# Altium PCB PCB1_corrosao.PcbDoc (part 2 of 2)
Units mil, origin at the board's own origin, x right, y up, seen from the top; angles counter-clockwise.
Board outline 5775 x 3675 mil, 2 copper layers (Top Layer, Bottom Layer); 104 components, 55 nets, 279 pads, 10 vias.
Unrouted connection lines stored in the file: 28.
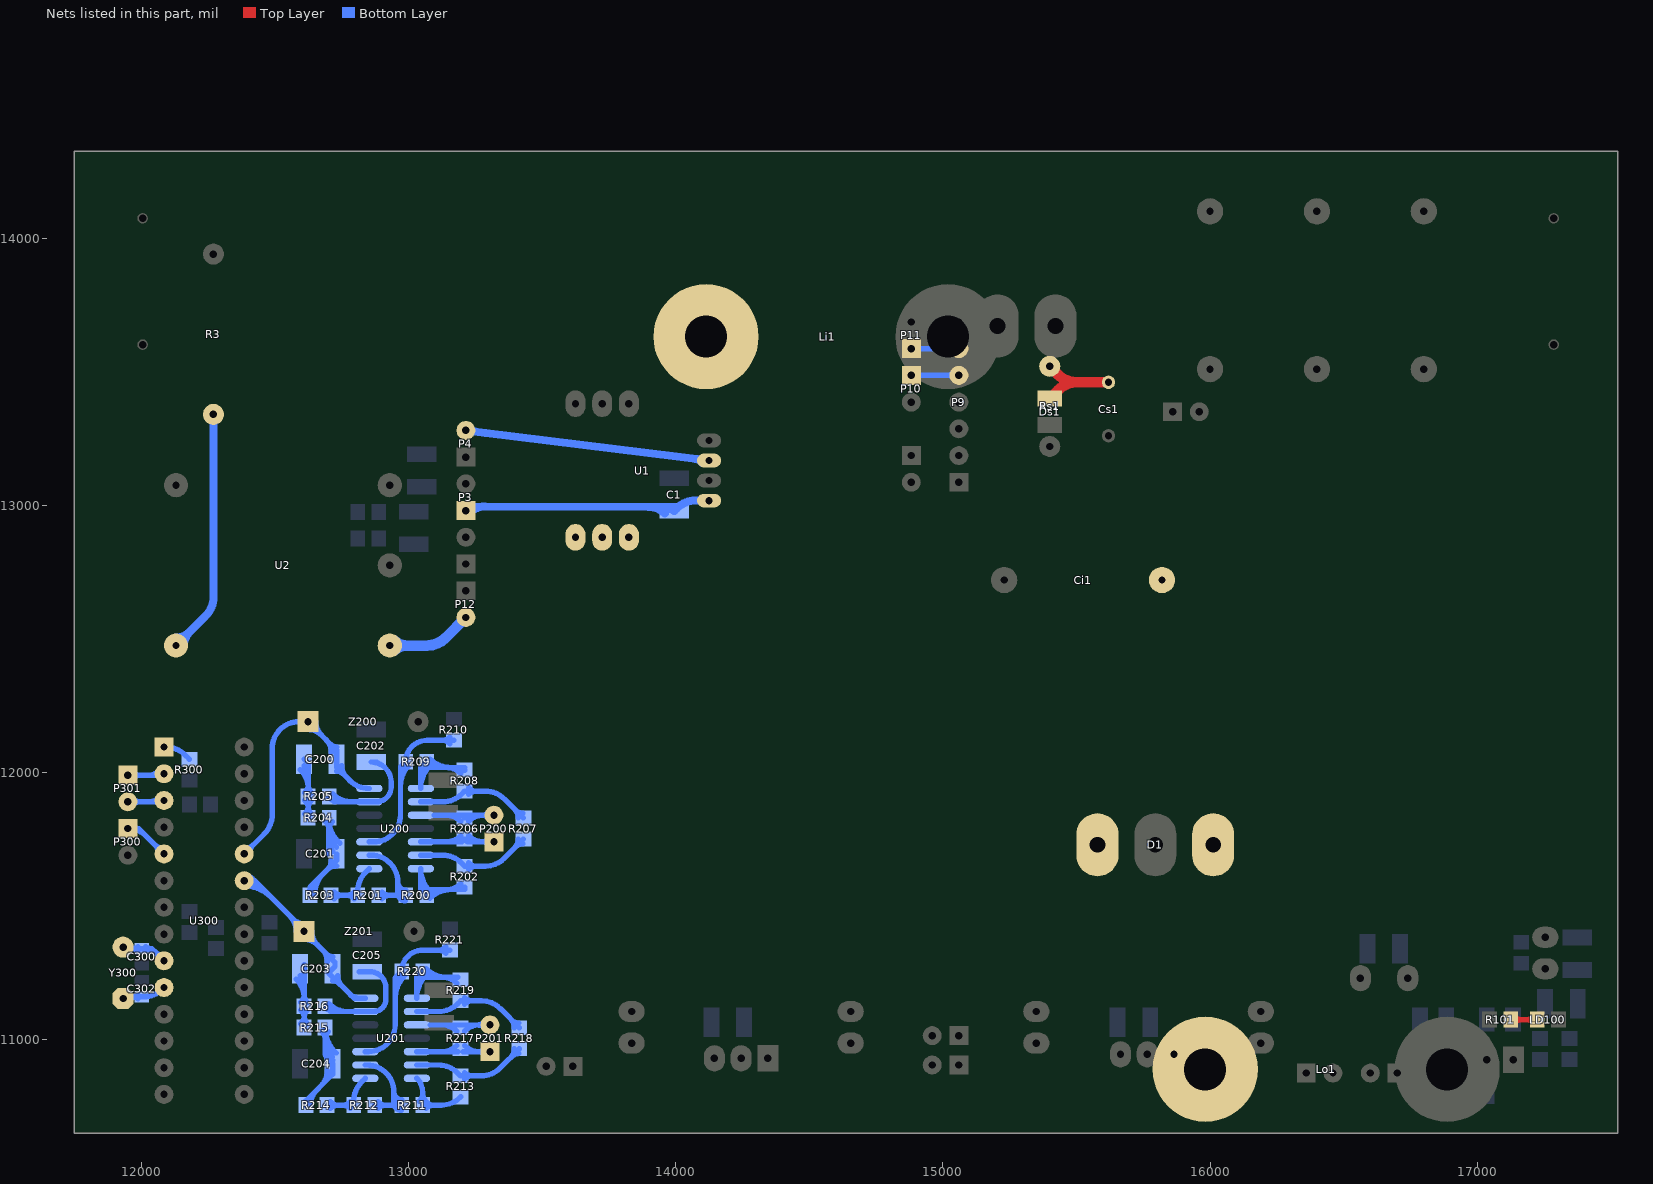
[diagram p2: the nets of this part, all layers, seen from the top]

## Via types
v1: diameter 47.24, hole 27.56, Top Layer to Bottom Layer, 8 vias
v2: diameter 255.91, hole 118.11, Top Layer to Bottom Layer, 2 vias

## Nets (pads, with @x,y where several pads share a name; then routed paths per layer and width w, separated by ;. In a path a pad name is that pad's centre, name@x,y a point inside that pad or via, vN(x,y) a via of type N, cw(c..) or ccw(c..) an arc to the next point about the centre after c; other vN are vias at no path point) (continued)
NetC200_1: C200.1 R204.1 R205.2 | length 544.1
  Bottom Layer w20: C200.1@12595.17,12010.6 cw(c12524.95,11940.39) 12624.25,11940.39 ; C200.1@12608.98,12050 12624.25,12034.72 R205.2@12624.25,11910 R204.1@12624.25,11830 ; C200.1@12609.31,12024.74 cw(c12573.24,11988.67) 12624.25,11988.67 ; R204.1@12611.84,11844.38 ccw(c12581.86,11874.36) 12624.25,11874.36 ccw(c12666.64,11874.36) R204.1@12636.67,11844.38 ; R205.2@12611.84,11895.62 cw(c12581.86,11865.64) 12624.25,11865.64 cw(c12666.64,11865.64) R205.2@12636.67,11895.62 ; R205.2@12611.84,11924.38 ccw(c12581.86,11954.36) 12624.25,11954.36 ccw(c12666.64,11954.36) R205.2@12636.67,11924.38
NetC200_2: C200.2 U200.14 U300.24 Z200.2 | length 1451.2
  Bottom Layer w19.68: U300.24@12385,11695 12460.71,11770.71 ; U300.24@12385,11714.68 ccw(c12385,11762.21) 12418.6,11728.6 ccw(c12452.21,11695) U300.24@12404.68,11695
  Bottom Layer w20: 12460.71,11770.71 ccw(c12390,11841.42) 12490,11841.42 12490,12090 cw(c12590,12090) 12497.16,12127.16 cw(c12590,12090) 12552.84,12182.84 cw(c12590,12090) 12590,12190 Z200.2@12624.09,12190 12731.02,12083.07 C200.2@12731.02,12050 ; Z200.2@12624.09,12160.63 cw(c12624.09,12089.72) 12674.23,12139.86 cw(c12724.37,12190) Z200.2@12653.46,12190 ; 12692.4,12121.7 cw(c12646.29,12075.59) C200.2@12711.5,12075.59 ; C200.2@12710.46,12103.64 ccw(c12731.02,12124.2) C200.2@12731.02,12095.12 ; C200.2@12731.02,12004.88 cw(c12731.02,11970.85) C200.2@12755.08,11994.92 ; C200.2@12750.55,12024.41 ccw(c12810.81,12024.41) 12768.2,11981.8 ; U200.14@12853.54,11940 12851.42,11940 cw(c12851.42,12040) 12780.71,11969.29 12731.02,12018.98 C200.2@12731.02,12050 ; C200.2@12731.02,12050 ccw(c12651.18,12050) 12707.64,12106.46 cw(c12651.18,12050) C200.2@12731.02,12050
NetC201_2: C201.2 R203.1 R204.2 | length 838.4
  Bottom Layer w20: R203.1@12628.82,11541.97 cw(c12693.64,11541.97) 12647.8,11587.8 ; R203.1@12631.26,11540 12631.26,11571.26 12731.02,11671.02 C201.2@12731.02,11695 ; R203.1@12648.82,11541.97 cw(c12761.93,11541.97) 12681.95,11621.95 ; R204.2@12690.58,11815.62 cw(c12665.35,11790.39) 12701.02,11790.39 ; 12694.93,11634.93 cw(c12731.02,11598.84) C201.2@12731.02,11649.88 ; 12698.83,11638.83 ccw(c12668.25,11669.41) C201.2@12711.5,11669.41 ; 12701.02,11695 12701.02,11828.03 ccw(c12822.79,11828.03) C201.2@12743.71,11735.44 ; 12701.02,11697.87 ccw(c12711.62,11697.87) C201.2@12704.74,11689.82 ; 12701.02,11741.26 ccw(c12748.68,11741.26) C201.2@12717.73,11705.02 ; 12701.02,11780.89 cw(c12750.14,11780.89) R204.2@12715.41,11815.62 ; 12701.02,11784.64 ccw(c12785.73,11784.64) C201.2@12730.72,11720.23
NetC202_2: C202.2 R205.1 U200.13 | length 581.3
  Bottom Layer w20: R205.1@12701.27,11906.31 ccw(c12740.63,11945.67) 12740.63,11890 ; R205.1@12702.99,11910 12722.99,11890 U200.13@12853.54,11890 ; R205.1@12715.41,11920.45 ccw(c12788.92,11993.95) 12788.92,11890 ; C202.2@12881.02,12038.98 C202.2@12860,12038.98 cw(c12860,11963.98) 12935,11963.98 12935,11945 cw(c12880,11945) U200.13@12880,11890 ; U200.13@12853.54,11890 U200.13@12880,11890 ; U200.13@12853.54,11890 U200.13@12880,11890
NetC203_1: C203.1 R215.1 R216.2 | length 559.4
  Bottom Layer w20: C203.1@12580.17,11225.6 cw(c12508.15,11153.58) R216.2@12610,11153.58 ; C203.1@12594.31,11239.74 cw(c12556.43,11201.87) 12610,11201.87 ; R215.1@12596.84,11059.38 ccw(c12566.86,11089.36) 12609.25,11089.36 ccw(c12651.64,11089.36) R215.1@12621.67,11059.38 ; R216.2@12596.84,11110.62 cw(c12566.86,11080.64) 12609.25,11080.64 cw(c12651.64,11080.64) R216.2@12621.67,11110.62 ; R216.2@12596.84,11139.38 ccw(c12565.05,11171.17) 12610,11171.17 ; R215.1@12609.25,11045 R216.2@12609.25,11125 R216.2@12610,11124.25 ; 12610,11167.55 ccw(c12649.84,11167.55) R216.2@12621.67,11139.38 ; C203.1@12610,11280 12610,11265 R216.2@12610,11125 ; R216.2@12610,11124.25 R216.2@12610,11125 ; R216.2@12610,11124.25 R216.2@12610,11125
NetC203_2: C203.2 U201.14 U300.23 Z201.2 | length 1456.3
  Bottom Layer w20: U300.23@12384.72,11595.38 cw(c12403.83,11569.14) 12426.79,11592.1 ; U300.23@12385,11575.47 cw(c12385,11434.46) 12484.71,11534.17 ; U300.23@12385,11595 12423.88,11595 ; U300.23@12385,11595.47 cw(c12385,11502.74) 12450.57,11568.31 ; U300.23@12385,11615.47 cw(c12385,11571.03) U300.23@12416.43,11602.45 ; U300.23@12396.5,11579.22 cw(c12417.77,11550.01) 12443.32,11575.56 ; U300.23@12400.66,11583.34 cw(c12423.88,11566.06) 12423.88,11595 ; U300.23@12400.66,11606.66 ccw(c12423.88,11623.94) 12423.88,11595 ; 12555.57,11463.31 cw(c12497.26,11405) Z201.2@12579.72,11405 ; 12567.13,11451.75 ccw(c12609.09,11493.71) Z201.2@12609.09,11434.37 ; Z201.2@12609.09,11375.63 cw(c12609.09,11304.72) 12659.23,11354.86 cw(c12709.37,11405) Z201.2@12638.46,11405 ; 12677.4,11336.7 cw(c12631.29,11290.59) C203.2@12696.5,11290.59 ; C203.2@12695.46,11318.64 ccw(c12716.02,11339.2) C203.2@12716.02,11310.12 ; C203.2@12716.02,11219.88 cw(c12716.02,11183.38) 12741.83,11209.19 ; C203.2@12735.55,11239.41 ccw(c12793.34,11239.41) 12752.48,11198.55 ; 12784.56,11166.46 ccw(c12803.11,11185.01) U201.14@12803.11,11158.78 ; U201.14@12838.54,11155 12796.02,11155 12701.02,11250 12725,11273.98 12725,11289.09 Z201.2@12609.09,11405 12609.09,11409.79 12423.88,11595
NetC204_2: C204.2 R214.1 R215.2 | length 885.5
  Bottom Layer w20: R214.1@12614.25,10755 12614.25,10768.7 12716.02,10870.47 C204.2@12716.02,10910 ; R214.1@12633.82,10756.97 cw(c12709.38,10756.97) 12655.95,10810.4 ; 12672.83,10827.28 ccw(c12615.71,10884.41) C204.2@12696.5,10884.41 ; R215.2@12675.58,11030.62 cw(c12645.6,11000.64) 12687.99,11000.64 cw(c12730.38,11000.64) R215.2@12700.41,11030.62 ; C204.2@12687.99,10952.98 ccw(c12732.24,10952.98) C204.2@12702.06,10920.62 ; 12687.99,10998.99 ccw(c12775.16,10998.99) C204.2@12715.7,10935.25 ; C204.2@12716.02,10922.43 12687.99,10950.46 R215.2@12687.99,11045 ccw(c12818.08,11044.99) C204.2@12729.34,10949.87 ; C204.2@12716.02,10910 cw(c12783.7,10977.67) 12687.99,10977.67 ccw(c12783.7,10977.67) C204.2@12716.02,10910
NetC205_2: C205.2 R216.1 U201.13 | length 565
  Bottom Layer w20: R216.1@12686.27,11121.31 ccw(c12725.63,11160.67) 12725.63,11105 ; R216.1@12687.99,11125 12707.99,11105 U201.13@12838.54,11105 12870,11105 ccw(c12870,11150) 12915,11150 12915,11195 ccw(c12856.02,11195) 12856.02,11253.98 C205.2@12815,11253.98 ; R216.1@12700.41,11135.45 ccw(c12773.92,11208.95) 12773.92,11105
NetC300_2: C300.2 U300.9 Y300.2 | length 480.4
  Bottom Layer w20: Y300.2@11944.42,11333.65 cw(c11959.75,11318.31) Y300.2@11959.75,11340 ; Y300.2@11944.42,11358.48 ccw(c11989.03,11403.09) C300.2@11989.03,11340 ; Y300.2@11950,11340 12040,11340 U300.9@12085,11295 12066.87,11313.13 ccw(c12002,11248.26) C300.2@12002,11340 ; C300.2@11987.85,11331.76 ccw(c11967.96,11311.87) 11967.96,11340 ccw(c11967.96,11368.13) C300.2@11987.85,11348.24 ; C300.2@12016.15,11331.76 cw(c12036.04,11311.87) 12036.04,11340 cw(c12036.04,11368.13) C300.2@12016.15,11348.24 ; U300.9@12065.47,11295 ccw(c12018.33,11295) 12051.66,11328.34 ccw(c12085,11361.67) U300.9@12085,11314.53
NetC302_2: C302.2 U300.10 Y300.1 | length 250
  Bottom Layer w20: Y300.1@11944.42,11141.52 cw(c11990.17,11095.77) C302.2@11990.17,11160.47 ; Y300.1@11950,11170.47 11950,11160.47 C302.2@12002,11160.47 12009.05,11160.47 ccw(c12009.05,11260.47) 12079.76,11189.76 U300.10@12085,11195 ; C302.2@11987.85,11152.23 ccw(c11967.96,11132.34) 11967.96,11160.47 ccw(c11967.96,11188.61) C302.2@11987.85,11168.71
NetCi1_2: Ci1.2 D1.1 D1.3 Lo1.2
NetCs1_2: Cs1.2 Ds1.K Rs1.1 | length 393.2
  Top Layer w39.37: Ds1.K@15400,13399.34 15431.37,13430.71 ; Rs1.1@15400,13520 15430.71,13489.29 ccw(c15501.42,13560) 15501.42,13460 ; Ds1.K@15425.02,13402.63 cw(c15450.44,13411.64) 15431.37,13430.71 ; Cs1.2@15620,13460 15502.08,13460 ccw(c15502.08,13360) 15431.37,13430.71
NetLD100_1: LD100.1 R101.1 | length 233.2
  Top Layer w20: R101.1@17125,11075 LD100.1@17225,11075 ; R101.1@17137.42,11062.58 cw(c17167.39,11032.61) 17167.39,11075 cw(c17167.39,11117.39) R101.1@17137.42,11087.42 ; LD100.1@17212.58,11062.58 ccw(c17182.61,11032.61) 17182.61,11075 ccw(c17182.61,11117.39) LD100.1@17212.58,11087.42
NetLi1_1: Li1.1 U1.4 U1.5 U1.6
NetP4_2: P4.2 U1.9 | length 998.6
  Bottom Layer w30: P4.2@13215,13280 13289.18,13270.82 U1.9@14125,13167.4 ; P4.2@13223.93,13268.54 cw(c13245.5,13240.89) 13249.81,13275.69 cw(c13254.11,13310.5) P4.2@13226.46,13288.93 ; 14074.45,13173.66 cw(c14070.29,13140.09) U1.9@14096.96,13160.89
NetP9_5: P9.5 P10.1 | length 326.1
  Bottom Layer w20: P10.1@14882,13486 P9.5@15060,13486 ; P10.1@14895.81,13472.19 cw(c14929.14,13438.86) 14929.14,13486 cw(c14929.14,13533.14) P10.1@14895.81,13499.81 ; P9.5@15046.19,13472.19 ccw(c15012.86,13438.86) 15012.86,13486 ccw(c15012.86,13533.14) P9.5@15046.19,13499.81
NetP9_6: P9.6 P11.1 P300.1 U300.5 | length 782.9
  Bottom Layer w20: P300.1@11965.4,11777.99 cw(c11990,11758.8) 11990,11790 ; P300.1@11965.4,11802.01 ccw(c11990,11821.2) 11990,11790 ; U300.5@12065.47,11695 ccw(c12018.33,11695) 12051.66,11728.34 ccw(c12085,11761.67) U300.5@12085,11714.53 ; U300.5@12085,11695 11990,11790 ; P11.1@14882,13586 P9.6@15060,13586 ; P11.1@14895.81,13572.19 cw(c14929.14,13538.86) 14929.14,13586 cw(c14929.14,13633.14) P11.1@14895.81,13599.81 ; P9.6@15046.19,13572.19 ccw(c15012.86,13538.86) 15012.86,13586 ccw(c15012.86,13633.14) P9.6@15046.19,13599.81 ; P300.1@11950,11790 cw(c11950,11693.43) 12018.28,11761.72 ccw(c11950,11693.43) P300.1@11950,11790 ; P300.1@11950,11790 11990,11790
NetP12_2: P12.2 U2.1 | length 421.2
  Bottom Layer w39.37: U2.1@12930,12475 13068.58,12475 ccw(c13068.58,12575) 13139.29,12504.29 P12.2@13215,12580 ; U2.1@12948.1,12456.9 cw(c12991.78,12413.22) 12991.78,12475 cw(c12991.78,12536.78) U2.1@12948.1,12493.1
NetP200_1: P200.1 R206.2 U200.5 | length 480
  Bottom Layer w20: U200.5@13046.46,11740 13199.37,11740 R206.2@13210,11750.63 13220.63,11740 P200.1@13320,11740 ; 13139.98,11740 ccw(c13139.98,11818.68) R206.2@13195.62,11763.05 ; R206.2@13224.38,11763.05 ccw(c13280.02,11818.68) 13280.02,11740 ; P200.1@13306.19,11726.19 ccw(c13272.86,11692.86) 13272.86,11740 ccw(c13272.86,11787.14) P200.1@13306.19,11753.81
NetP200_2: P200.2 R206.1 U200.3 | length 436.2
  Bottom Layer w20: 13096.46,11840 13210,11840 R206.1@13220.63,11840 ; 13139.98,11840 cw(c13139.98,11761.32) R206.1@13195.62,11816.95 ; R206.1@13210,11829.37 R206.1@13220.63,11840 ; R206.1@13224.38,11816.95 cw(c13280.02,11761.32) 13280.02,11840 ; P200.2@13306.19,11826.19 ccw(c13272.86,11792.86) 13272.86,11840 ccw(c13272.86,11887.14) P200.2@13306.19,11853.81 ; P200.2@13320,11840 R206.1@13220.63,11840
NetP201_1: P201.1 R217.2 U201.5 | length 449.9
  Bottom Layer w20: U201.5@13031.46,10955 R217.2@13184.37,10955 ; 13124.98,10955 ccw(c13124.98,11033.68) R217.2@13180.62,10978.05 ; R217.2@13205.63,10955 P201.1@13305,10955 ; R217.2@13209.38,10978.05 ccw(c13265.02,11033.68) 13265.02,10955 ; P201.1@13291.19,10941.19 ccw(c13257.86,10907.86) 13257.86,10955 ccw(c13257.86,11002.14) P201.1@13291.19,10968.81
NetP201_2: P201.2 R217.1 U201.3 | length 410.6
  Bottom Layer w20: 13081.46,11055 R217.1@13195,11055 ; 13124.98,11055 cw(c13124.98,10976.32) R217.1@13180.62,11031.95 ; R217.1@13205.63,11055 P201.2@13305,11055 ; R217.1@13209.38,11031.95 cw(c13265.02,10976.32) 13265.02,11055 ; P201.2@13291.19,11041.19 ccw(c13257.86,11007.86) 13257.86,11055 ccw(c13257.86,11102.14) P201.2@13291.19,11068.81
NetP301_1: P301.1 U300.2 | length 285.2
  Bottom Layer w20: P301.1@11950,11990 12080,11990 U300.2@12085,11995 ; P301.1@11963.81,11976.19 cw(c11997.14,11942.86) 11997.14,11990 cw(c11997.14,12037.14) P301.1@11963.81,12003.81 ; 12025.79,11990 ccw(c12025.79,12054.21) U300.2@12071.19,12008.81 ; 12049.93,11990 cw(c12049.93,11959.93) U300.2@12071.19,11981.19
NetP301_2: P301.2 U300.3 | length 285.2
  Bottom Layer w20: P301.2@11950,11890 12080,11890 U300.3@12085,11895 ; P301.2@11963.81,11876.19 cw(c11997.14,11842.86) 11997.14,11890 cw(c11997.14,11937.14) P301.2@11963.81,11903.81 ; 12025.79,11890 ccw(c12025.79,11954.21) U300.3@12071.19,11908.81 ; 12049.93,11890 cw(c12049.93,11859.93) U300.3@12071.19,11881.19
NetR3_1: R3.1 U2.4 | length 1081.1
  Bottom Layer w30: U2.4@12130,12475 12240.71,12585.71 ccw(c12170,12656.42) 12270,12656.42 R3.1@12270,13340 ; U2.4@12130,12505.28 ccw(c12130,12578.37) 12181.68,12526.68 ccw(c12233.37,12475) U2.4@12160.28,12475 ; R3.1@12261.12,13331.12 cw(c12239.68,13309.68) 12270,13309.68 cw(c12300.32,13309.68) R3.1@12278.88,13331.12
NetR200_1: R200.1 R201.2 U200.9 | length 586.7
  Bottom Layer w20: U200.9@12853.54,11690 12860,11690 cw(c12860,11590) 12960,11590 ; R201.2@12888.74,11540 12960,11540 ; R201.2@12901.16,11527.58 cw(c12931.13,11497.61) 12931.13,11540 cw(c12931.13,11582.39) R201.2@12901.16,11552.42 ; 12960,11549.06 ccw(c12989.53,11549.06) R200.1@12988.85,11519.53 ; 12960,11569.53 ccw(c12990.01,11569.53) R200.1@12989.31,11539.53 ; R200.1@12976.95,11527.58 ccw(c12946.98,11497.61) 12946.98,11540 ccw(c12946.98,11582.39) R200.1@12976.95,11552.42 ; R200.1@12989.37,11540 12960,11540 ; R200.1@12989.78,11559.52 cw(c12990.48,11590) 12960,11590 ; 12960,11540 12960,11590
NetR200_2: R200.2 R202.2 U200.7 | length 591
  Bottom Layer w20: 13046.46,11588.35 ccw(c13114.49,11588.35) R200.2@13066.38,11540.24 ; U200.7@13046.46,11636.64 ccw(c13162.78,11636.64) R200.2@13080.53,11554.38 ; U200.7@13046.46,11640 13046.46,11561.65 13068.11,11561.65 R202.2@13201.02,11561.65 ; R200.2@13066.38,11543.69 cw(c13109.74,11500.34) 13109.74,11561.65 ; R200.2@13080.53,11529.55 cw(c13158.03,11452.05) 13158.03,11561.65 ; 13143.97,11561.65 ccw(c13143.97,11634.69) R202.2@13195.62,11583.05 ; R202.2@13210,11561.65 R202.2@13201.02,11561.65 ; R202.2@13210,11570.63 R202.2@13201.02,11561.65
NetR201_1: R201.1 R203.2 U200.8 | length 359.3
  Bottom Layer w20: R203.2@12710,11540 R201.1@12810,11540 ; R203.2@12722.42,11527.58 cw(c12752.39,11497.61) 12752.39,11540 cw(c12752.39,11582.39) R203.2@12722.42,11552.42 ; R201.1@12797.58,11527.58 ccw(c12767.61,11497.61) 12767.61,11540 ccw(c12767.61,11582.39) R201.1@12797.58,11552.42 ; R201.1@12801.26,11531.26 R201.1@12810,11540 ; U200.8@12853.54,11640 12839.29,11625.75 ccw(c12910,11555.04) 12810,11555.04 R201.1@12810,11540
NetR202_1: R202.1 R207.2 U200.6 | length 566.9
  Bottom Layer w20: U200.6@13046.46,11690 13127.95,11690 cw(c13127.95,11590) 13198.66,11660.71 R202.1@13210,11649.37 13287.32,11649.37 ccw(c13287.32,11749.37) 13357.92,11678.55 ccw(c13287.32,11749.37) 13358.03,11678.66 R207.2@13430,11750.63 ; R202.1@13224.38,11636.95 cw(c13254.36,11606.98) 13254.36,11649.37 cw(c13254.36,11691.76) R202.1@13224.38,11661.79 ; 13396.66,11717.29 ccw(c13363.33,11750.63) R207.2@13410.47,11750.63 ; 13401.42,11722.05 cw(c13428.03,11695.43) R207.2@13428.03,11733.07
NetR207_1: R207.1 R208.2 U200.2 | length 566.4
  Bottom Layer w20: U200.2@13046.46,11890 13128.58,11890 ccw(c13128.58,11990) 13199.29,11919.29 R208.2@13210,11930 13287.95,11930 cw(c13287.95,11830) 13358.66,11900.71 R207.1@13430,11829.37 ; R208.2@13224.38,11917.58 cw(c13254.36,11887.61) 13254.36,11930 cw(c13254.36,11972.39) R208.2@13224.38,11942.42 ; 13396.66,11862.71 cw(c13363.33,11829.37) R207.1@13410.47,11829.37 ; 13401.42,11857.95 ccw(c13428.03,11884.57) R207.1@13428.03,11846.93
NetR208_1: R208.1 R209.2 U200.1 | length 593.6
  Bottom Layer w20: U200.1@13046.46,11940 13046.46,12018.35 13068.11,12018.35 R208.1@13200.39,12018.35 ; U200.1@13046.46,11943.36 cw(c13162.78,11943.36) R209.2@13080.53,12025.62 ; 13046.46,11991.65 cw(c13114.49,11991.65) R209.2@13066.38,12039.76 ; R209.2@13066.38,12036.31 ccw(c13109.74,12079.66) 13109.74,12018.35 ; R209.2@13080.53,12050.45 ccw(c13158.03,12127.95) 13158.03,12018.35 ; 13142.45,12018.35 cw(c13142.45,11943.16) R208.1@13195.62,11996.32 ; R208.1@13210,12008.74 R208.1@13200.39,12018.35 ; R208.1@13210,12018.35 R208.1@13200.39,12018.35
NetR209_1: R209.1 R210.2 U200.10 | length 932.7
  Bottom Layer w20: U200.10@12853.54,11740 12870,11740 ccw(c12870,11840) 12970,11840 12970,12020.63 R209.1@12989.37,12040 ; 12970,11948.88 cw(c13078.52,11948.88) R209.1@13001.79,12025.62 ; 12970,11997.16 cw(c13030.24,11997.16) R209.1@12987.64,12039.76 ; R210.2@13155.62,12107.58 ccw(c13125.64,12077.61) 13125.64,12120 ccw(c13125.64,12162.39) R210.2@13155.62,12132.42 ; R210.2@13170,12120 13069.37,12120 ; R209.1@12989.37,12040 cw(c13069.37,12040) 13069.37,12120 ; R209.1@12989.37,12040 cw(c13069.37,12040) 13069.37,12120
NetR211_1: R211.1 R212.2 U201.9 | length 557.3
  Bottom Layer w20: U201.9@12838.54,10905 12845,10905 cw(c12845,10805) 12945,10805 ; R212.2@12873.74,10755 12945,10755 12945,10805 ; R212.2@12886.16,10742.58 cw(c12916.13,10712.61) 12916.13,10755 cw(c12916.13,10797.39) R212.2@12886.16,10767.42 ; 12945,10764.06 ccw(c12974.53,10764.06) R211.1@12973.85,10734.53 ; 12945,10784.53 ccw(c12975.01,10784.53) R211.1@12974.31,10754.53 ; R211.1@12961.95,10742.58 ccw(c12931.98,10712.61) 12931.98,10755 ccw(c12931.98,10797.39) R211.1@12961.95,10767.42 ; R211.1@12974.78,10774.52 cw(c12975.48,10805) 12945,10805
NetR211_2: R211.2 R213.2 U201.7 | length 389.2
  Bottom Layer w20: U201.7@13031.46,10855 cw(c12979.18,10802.72) 13053.11,10802.72 R211.2@13053.11,10755 13122.95,10755 ccw(c13122.95,10855) 13193.66,10784.29 R213.2@13195,10785.63 ; R211.2@13040.69,10769.38 ccw(c13010.72,10799.36) 13053.11,10799.36 ccw(c13095.5,10799.36) R211.2@13065.53,10769.38 ; R211.2@13065.53,10742.58 cw(c13095.5,10712.61) 13095.5,10755 cw(c13095.5,10797.39) R211.2@13065.53,10767.42
NetR212_1: R212.1 R214.2 U201.8 | length 353.9
  Bottom Layer w20: R214.2@12687.99,10755 R214.2@12695,10755 R212.1@12795,10755 12795,10770.04 cw(c12895,10770.04) 12824.29,10840.75 U201.8@12838.54,10855 ; R214.2@12707.42,10742.58 cw(c12737.39,10712.61) 12737.39,10755 cw(c12737.39,10797.39) R214.2@12707.42,10767.42 ; R212.1@12782.58,10742.58 ccw(c12752.61,10712.61) 12752.61,10755 ccw(c12752.61,10797.39) R212.1@12782.58,10767.42
NetR213_1: R213.1 R218.2 U201.6 | length 566.9
  Bottom Layer w20: U201.6@13031.46,10905 13112.95,10905 cw(c13112.95,10805) 13183.66,10875.71 R213.1@13195,10864.37 13272.32,10864.37 ccw(c13272.32,10964.37) 13272.52,10864.37 ccw(c13272.32,10964.37) 13342.92,10893.55 ccw(c13272.32,10964.37) 13343.03,10893.66 R218.2@13415,10965.63 ; R213.1@13209.38,10851.95 cw(c13239.36,10821.98) 13239.36,10864.37 cw(c13239.36,10906.76) R213.1@13209.38,10876.79 ; 13381.66,10932.29 ccw(c13348.33,10965.63) R218.2@13395.47,10965.63 ; 13386.42,10937.05 cw(c13413.03,10910.43) R218.2@13413.03,10948.07
NetR218_1: R218.1 R219.2 U201.2 | length 566.4
  Bottom Layer w20: U201.2@13031.46,11105 13113.58,11105 ccw(c13113.58,11205) 13184.29,11134.29 R219.2@13195,11145 13272.95,11145 cw(c13272.95,11045) 13343.66,11115.71 R218.1@13415,11044.37 ; R219.2@13209.38,11132.58 cw(c13239.36,11102.61) 13239.36,11145 cw(c13239.36,11187.39) R219.2@13209.38,11157.42 ; 13381.66,11077.71 cw(c13348.33,11044.37) R218.1@13395.47,11044.37 ; 13386.42,11072.95 ccw(c13413.03,11099.57) R218.1@13413.03,11061.93
NetR219_1: R219.1 R220.2 U201.1 | length 548.7
  Bottom Layer w20: U201.1@13031.46,11155 R220.2@13031.46,11233.35 ; U201.1@13031.46,11158.36 cw(c13147.78,11158.36) R220.2@13065.53,11240.62 ; 13031.46,11206.65 cw(c13099.49,11206.65) R220.2@13051.38,11254.76 ; R220.2@13051.38,11251.31 ccw(c13094.74,11294.66) 13094.74,11233.35 ; R220.2@13053.11,11233.35 R219.1@13185.39,11233.35 ; R220.2@13065.53,11265.45 ccw(c13143.03,11342.95) 13143.03,11233.35 ; 13127.45,11233.35 cw(c13127.45,11158.16) R219.1@13180.62,11211.32
NetR220_1: R220.1 R221.2 U201.10 | length 830.9
  Bottom Layer w20: U201.10@12838.54,10955 12850,10955 ccw(c12850,11055) 12950,11055 12950,11230.63 R220.1@12974.37,11255 cw(c13054.37,11255) 13054.37,11335 R221.2@13155,11335 ; 12950,11151.81 cw(c13075.6,11151.81) R220.1@12986.79,11240.62 ; 12950,11200.09 cw(c13027.31,11200.09) R220.1@12972.64,11254.76 ; R221.2@13140.62,11322.58 ccw(c13110.64,11292.61) 13110.64,11335 ccw(c13110.64,11377.39) R221.2@13140.62,11347.42
NetR300_1: R300.1 U300.1 | length 109.6
  Bottom Layer w20: U300.1@12085,12095 12092.95,12095 cw(c12092.95,11995) 12163.66,12065.71 R300.1@12180,12049.37
VCC: C1.1 P3.1 U1.7 | length 1109
  Bottom Layer w30: P3.1@13215,12995 13995,12993.98 C1.1@13961.02,12978.98 ; P3.1@13217.47,12978.98 cw(c13217.47,12982.47) P3.1@13215,12980 ; P3.1@13225.26,12969.71 cw(c13286.19,12908.62) 13286.31,12994.91 ; 13898.06,12994.1 cw(c13897.95,12907.7) C1.1@13959.12,12968.72 ; U1.7@14125,13017.4 14074.85,13017.4 ccw(c14074.85,12917.4) 14004.14,12988.11 C1.1@13995,12978.98 ; P3.1@13215,12980 ccw(c13216.02,12980) 13216.02,12978.98 cw(c13216.02,12980) P3.1@13215,12980 ; C1.1@13995,12978.98 ccw(c13992.53,12976.51) 13992.53,12980 cw(c13992.53,12976.51) C1.1@13995,12978.98 ; C1.1@13995,12978.98 ccw(c13993.98,12978.98) 13993.98,12980 cw(c13993.98,12978.98) C1.1@13995,12978.98
pads on no net: P9.3 U1.10 U300.4 U300.6 U300.11 U300.12 U300.13 U300.14 U300.15 U300.16 U300.17 U300.18 U300.19 U300.21 U300.25 U300.26 U300.27 U300.28
copper on no net:
  other v2: 15795.28,10961.42 15204.72,14438.58

## Polygon pours and split planes (outlines as drawn)
-VPANEL on Bottom Layer "Top Layer--VBAT" (solid, pour order 1023): 15550,13290 15660,13290 15660,13190 15650,13180
+VPANEL on Bottom Layer "Top Layer--VBAT" (solid, pour order 1070): 12453,13800 11808,13800 11808,13886.3 11808,13380 12331.52,13380
NetLi1_1 on Bottom Layer "Top Layer--VBAT" (solid, pour order 1055): 13920,12880 13920,12320 cw(c13820,12320) 13820,12220 13700,12220 13620,12220 cw(c13620,12320) 13520,12320 13520,12740 13520,12840 cw(c13620,12840) 13620,12940 13800,12940 13820,12940 cw(c13820,12840) 13920,12840 13920,12760
-VPANEL on Bottom Layer "Top Layer--VBAT" (solid, pour order 1047): 15640,13291 15640,13418.58 ccw(c15540,13418.58) 15610.71,13489.29 15280,13820 15249.29,13850.71 ccw(c15178.58,13780) 15178.58,13880 14940,13880 14940,14280 15980,14280 15980,13880 15980,14020 16120,14020 16120,13880 16060,13880 15981.42,13880 ccw(c15981.42,13780) 15910.71,13850.71 15900,13840 15889.29,13829.29 ccw(c15960,13758.58) 15860,13758.58 15860,13580 15860,13020 15860,13001.42 cw(c15760,13001.42) 15830.71,12930.71 15700,12800
-VBAT on Bottom Layer "Top Layer--VBAT" (solid, pour order 1043): 17480,13800 16040,13800 ccw(c16040,13700) 15940,13700 15940,13000 15940,12941.42 ccw(c16040,12941.42) 15969.29,12870.71 16360,12480 16370.71,12469.29 cw(c16300,12398.58) 16400,12398.58 16400,11880 ccw(c16480,11880) 16480,11800 17480,11800 17480,12220
-VPANEL on Bottom Layer "Bottom Layer-+VPANEL" (solid, pour order 1039): 15640,13220 15640,13291 15825,13291 15825,12966.42 cw(c15725,12966.42) 15795.71,12895.71 15604.29,12704.29 15625,12725 15500,12600 15604.29,12704.29 ccw(c15675,12633.58) 15575,12633.58 15575,12200 cw(c15525,12200) 15525,12150 15475,12150 cw(c15475,12200) 15425,12200 15425,12658.58 cw(c15525,12658.58) 15454.29,12729.29 15600,12875 15610.71,12885.71 ccw(c15540,12956.42) 15640,12956.42
+VPANEL on Bottom Layer "Top Layer--VBAT" (solid, pour order 1035): 11972.73,13380 12016.36,13423.64 12019,13430 12019,13800 13658.58,13800 cw(c13658.58,13700) 13729.29,13770.71 13800,13700 13870.71,13629.29 cw(c13800,13558.58) 13900,13558.58 13900,13340 cw(c13840,13340) 13840,13280 13620,13280 cw(c13620,13340) 13560,13340 ccw(c13520,13340) 13520,13380
-VPANEL on Bottom Layer "Top Layer--VBAT" (solid, pour order 1031): 17480,13875 11808,13875 11808,14275 17480,14275
NetCi1_2 on Bottom Layer "Bottom Layer-+VPANEL" (solid, pour order 1027): 16325,11900 16325,12358.58 ccw(c16225,12358.58) 16295.71,12429.29 15825,12900 16075,12650 15979.29,12745.71 ccw(c15908.58,12675) 15908.58,12775 15800,12775 ccw(c15800,12714.64) 15757.32,12757.32 15650,12650 ccw(c15710.36,12589.64) 15625,12589.64 15625,12225 15625,12200 cw(c15525,12200) 15525,12100 15500,12100 15475,12100 cw(c15475,12200) 15375,12200 15375,12250 15375,12425 ccw(c15325,12425) 15325,12475 15225,12475 ccw(c15225,12425) 15175,12425 15175,12200 15175,12141.42 ccw(c15275,12141.42) 15204.29,12070.71 15325,11950 15445.71,11829.29 ccw(c15516.42,11900) 15516.42,11800 16200,11800 16225,11800 ccw(c16225,11900) 16325,11900 16325,12025
DRAIN on Bottom Layer "Top Layer--VBAT" (solid, pour order 1051): 14969,12660 14969,12439 15100,12439 15100,12440 cw(c15196.57,12440) 15128.28,12508.28 15320,12700 15550.71,12930.71 ccw(c15480,13001.42) 15580,13001.42 15580,13120 15420,13120 15420,13041.42 cw(c15320,13041.42) 15390.71,12970.71 15360,12940 15109.29,12689.29 cw(c15038.58,12760) 15038.58,12660
DRAIN on Bottom Layer "Top Layer--VBAT" (solid, pour order 1020): 14969,12660 14800,12660 ccw(c14800,12560) 14700,12560 14700,12320 ccw(c14770,12320) 14770,12250 15090,12250 14970,12250 15001.4,12250 ccw(c15001.4,12350) 15101.4,12350 15101.4,12458.93 15101.4,12559.52 ccw(c15001.4,12559.52) 15001.4,12659.52 14969,12659.52
-VBAT on Bottom Layer "Top Layer--VBAT" (solid, pour order 1024): 17335,11750 17405,11750 ccw(c17405,11770) 17425,11770 17425,11780 ccw(c17405,11780) 17405,11800 17335,11800 17335,11830 cw(c17345,11830) 17345,11840 17455,11840 17455,11720 17335,11720
-VPANEL on Bottom Layer "Top Layer--VBAT" (solid, pour order 1028): 15530,13310 15540,13310 ccw(c15540,13410) 15640,13410 15640,13460 cw(c15640,13420) 15680,13420 15680,13275 15540,13275 cw(c15540,13290) 15525,13290
-VBAT on Bottom Layer "Top Layer--VBAT" (solid, pour order 1032): 13250,13215 13250,13210 ccw(c13350,13210) 13350,13110 cw(c13335,13110) 13335,13095 13215,13095 13215,13180
+VPANEL on Bottom Layer "Top Layer--VBAT" (solid, pour order 1036): 12050,13380 cw(c12050,13310) 12120,13310 12120,13300 12140,13300 12140,13310 cw(c12210,13310) 12210,13380 12210,13435 cw(c12215,13435) 12215,13440 12050,13440
NetC104_2 on Bottom Layer "Top Layer--VBAT" (solid, pour order 1040): 17135,11310 17129.29,11304.29 ccw(c17200,11233.58) 17100,11233.58 17100,10945 17170,10945 cw(c17205,10945) 17205,10980 17375,10980 17375,11025 17375,11030 cw(c17375,11090.36) 17332.32,11047.68 17285,11095 17315,11065 17314.29,11065.71 cw(c17385,11136.42) 17285,11136.42 17285,11155 17285,11190 17275,11190 cw(c17275,11270) 17195,11270 17195,11295
-VBAT on Bottom Layer "Top Layer--VBAT" (solid, remove dead copper, pour order 1066): 14960,11210 15058.58,11210 15061,11210.03 15061,11210 15070,11201 15170,11201 15179,11210 15179,11280 15170,11289 15170,11398.58 cw(c15270,11398.58) 15199.29,11469.29 15310,11580 15450.71,11720.71 cw(c15521.42,11650) 15521.42,11750 17480,11750 17480,10670 13450,10670 13450,11210
-VBAT on Bottom Layer "Top Layer--VBAT" (solid, pour order 1048): 15058.58,11210 15070,11210 ccw(c15070,11310) 15170,11310 15170,11330 ccw(c15210,11330) 15210,11290 15220,11290 ccw(c15220,11280) 15210,11280 15210,11170 15070,11170
-VBAT on Bottom Layer "Top Layer--VBAT" (solid, pour order 1052): 13650,11210 13550,11210 cw(c13550,11310) 13450,11310 13450,11390 13400,11390 13400,11180 ccw(c13420,11180) 13420,11160 13650,11160
-VBAT on Bottom Layer "Top Layer--VBAT" (solid, pour order 1056): 17455,11840 ccw(c17466.25,11851.25) 17466.25,11835.34 17480,11835.34 17480,11721.05 17457.54,11721.05 ccw(c17457.54,11717.46) 17455,11720
-VBAT on Top Layer "Top Layer--VBAT" (solid, pour order 1058): 15058.58,11210 15070,11210 ccw(c15070,11310) 15170,11310 15170,11330 ccw(c15210,11330) 15210,11290 15220,11290 ccw(c15220,11280) 15210,11280 15210,11170 15070,11170
-VBAT on Top Layer "Top Layer--VBAT" (solid, remove dead copper, pour order 1063): 14960,11210 15058.58,11210 15061,11210.03 15061,11210 15070,11201 15170,11201 15179,11210 15179,11280 15170,11289 15170,11398.58 cw(c15270,11398.58) 15199.29,11469.29 15310,11580 15450.71,11720.71 cw(c15521.42,11650) 15521.42,11750 17480,11750 17480,10670 13450,10670 13450,11210
-VBAT on Top Layer "Top Layer--VBAT" (solid, pour order 1068): 15058.58,11210 15070,11210 ccw(c15070,11310) 15170,11310 15170,11330 ccw(c15210,11330) 15210,11290 15220,11290 ccw(c15220,11280) 15210,11280 15210,11170 15070,11170
-VBAT on Top Layer "Top Layer--VBAT" (solid, pour order 1072): 13650,11210 13550,11210 cw(c13550,11310) 13450,11310 13450,11390 13400,11390 13400,11180 ccw(c13420,11180) 13420,11160 13650,11160
NetCs1_2 on Top Layer "Top Layer--VBAT" (solid, pour order 1074): 15355,13400 15355,13433.58 cw(c15455,13433.58) 15384.29,13504.29 15400,13520 15430.71,13489.29 ccw(c15501.42,13560) 15501.42,13460 15630,13460 15502.08,13460 ccw(c15502.08,13360) 15431.37,13430.71 15405.21,13404.55
+5V_ADC on Top Layer "Top Layer--VBAT" (solid, pour order 1076): 12385,11295 13116,11062.98 cw(c13116,11145) 13058,11087 12900,11245 12864.29,11280.71 cw(c12935,11351.42) 12835,11351.42 12835,11415 12835,11453.58 cw(c12935,11453.58) 12864.29,11524.29 12972.98,11632.98 12664.29,11324.29 cw(c12593.58,11395) 12593.58,11295 12385,11295

## Dimensions
11740,10650 to 17525,10650 on Mechanical 1
11750,14325 to 11750,10650 on Mechanical 1

## Text inside footprints (layer, text, board x,y; h text height)
U1: Top Overlay "IN" at 13765,13295 h60 r180; Top Overlay "OUT" at 13805,13020 h60 r180; Top Overlay "+" at 14045,13050 h60 r180; Top Overlay "0" at 14045,13110 h39.37 r180; Top Overlay "M" at 14045,13185 h39.37 r180; Top Overlay "ref" at 14045,13255 h39.37 r180
U2: Top Overlay "-HT" at 12270,12410 h60 r90; Top Overlay "+HT" at 12270,13010 h60 r90; Top Overlay "+" at 12850,12755 h60 r90; Top Overlay "-" at 12850,13055 h60 r90; Top Overlay "M" at 12850,12455 h60 r90